# Altium PCB PCB1.PcbDoc
Units mil, origin at the board's own origin, x right, y up, seen from the top; angles counter-clockwise.
Board outline 6000 x 4000 mil, 2 copper layers (Top Layer, Bottom Layer); 11 components, 7 nets, 27 pads, 3 vias.
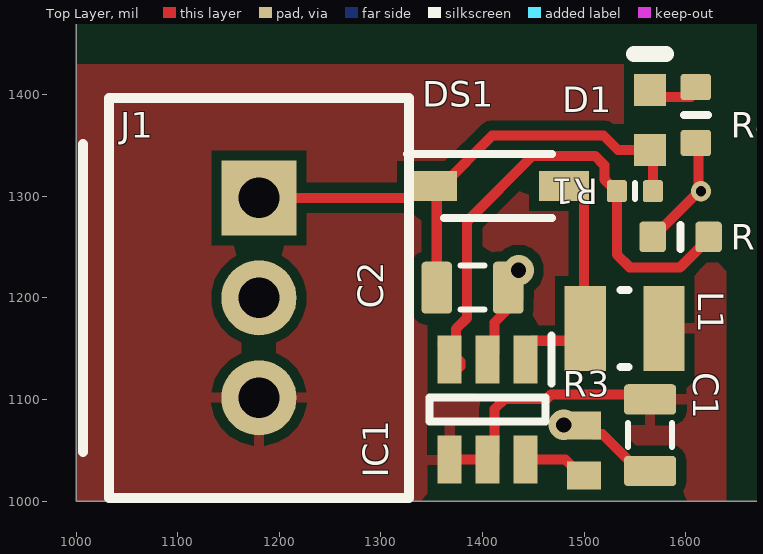
[diagram p0: Top Layer view]
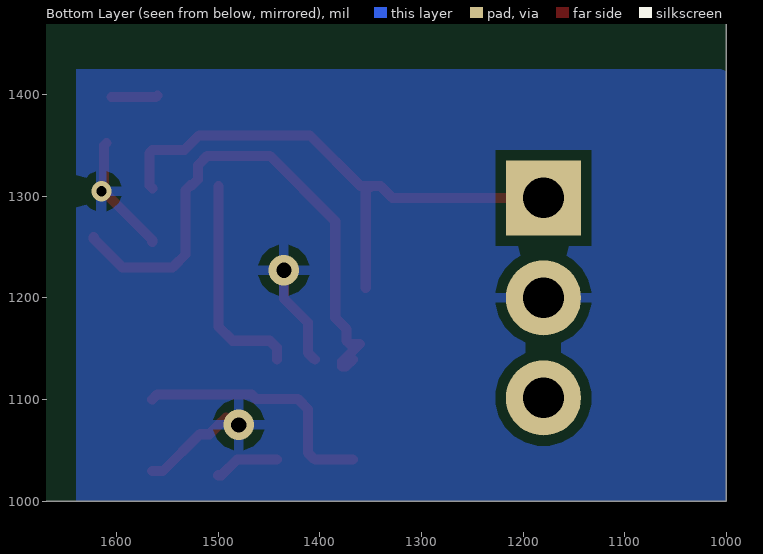
[diagram p1: Bottom Layer view, seen from below]
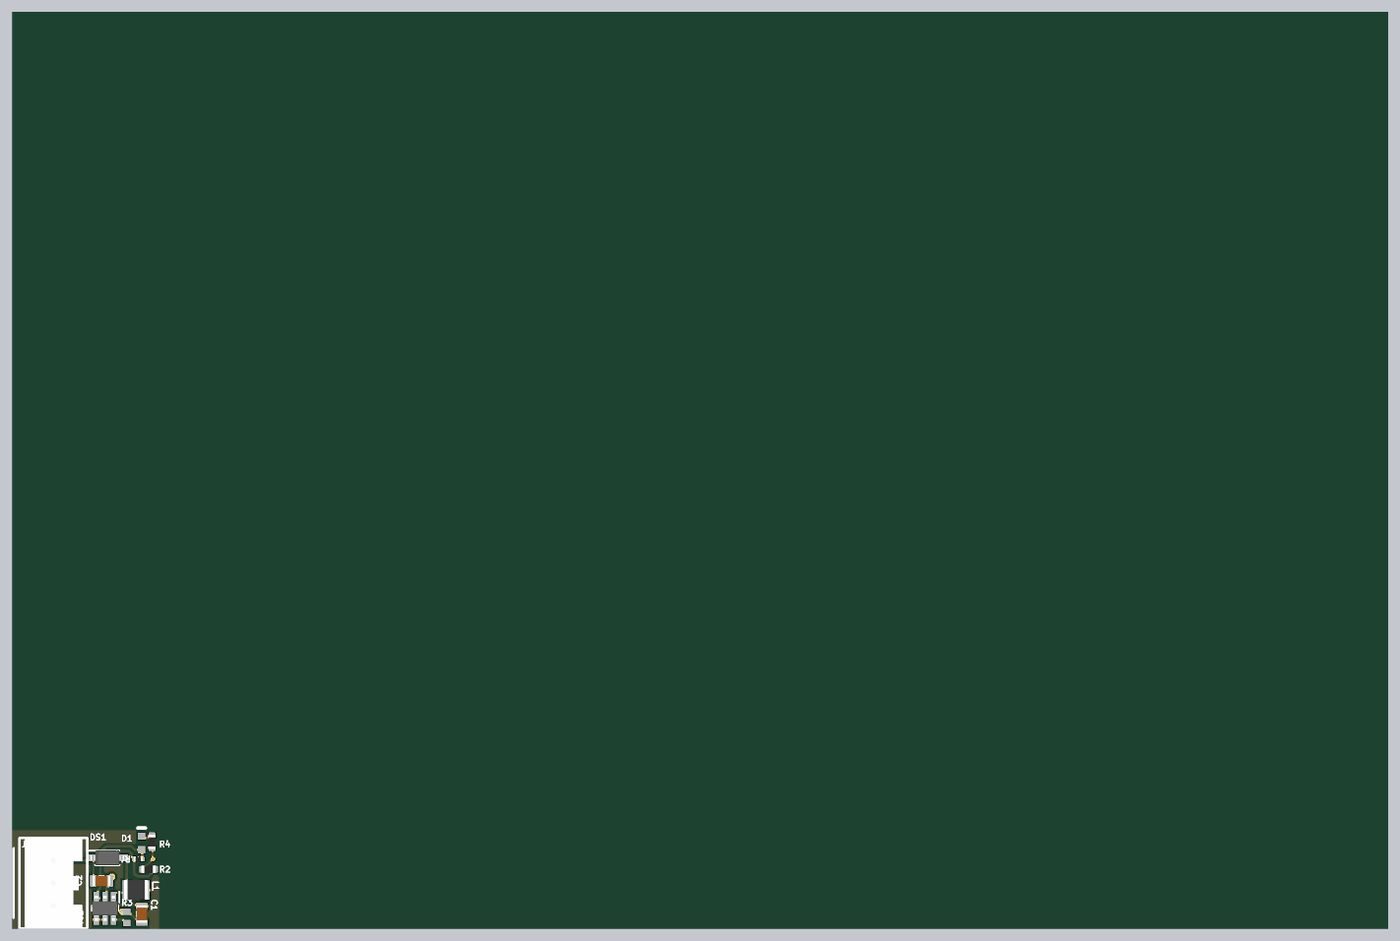
[diagram p2: 3D render of the assembled board from above, using the file's embedded part models]

## Layer stack, top to bottom
Top Solder: solder mask 0.4, Solder Resist, Dk 3.5
Top Layer: signal copper 1.4
Dielectric 1: dielectric 12.6, FR-4, Dk 4.8
Bottom Layer: signal copper 1.4
Bottom Solder: solder mask 0.4, Solder Resist, Dk 3.5

## Board outline
1000,1000 7000,1000 7000,5000 1000,5000

## Design rules (kind name [scope] priority, off if disabled: settings)
Clearance [All] p1: gap=10 ignorepadtopadclearanceinfootprint=FALSE
PolygonConnect [All] p1: connectstyle=Relief reliefconductorwidth=10 reliefentries=4 polygonreliefangle="90 Angle" airgapwidth=10
RoutingVias [All] p1: holewidth=28 width=50 viastyle="Through Hole" minholewidth=28 minwidth=50 maxholewidth=28 maxwidth=50
SolderMaskExpansion [All] p1: expansion=4 istentingtop=FALSE
SupplyNets "Schematic Supply Nets_2" [InNet('VCC')] p1: voltage=0.000
SupplyNets "Schematic Supply Nets_1" [InNet('GND')] p2: voltage=0.000
SupplyNets "Schematic Supply Nets" [InNet('+5')] p3: voltage=0.000
Width [All] p1: maxlimit=10 minlimit=10 preferedwidth=10
30 further rules are at their usual default settings.

## Components (designator, comment, footprint, x,y, rotation, side; value= is the part's Value field where it differs from the comment)
C1 "C0805C224K5RACTU" CAPC0805(2012)145_L 1565,1065 r90 top value=220nF
C2 "C0805C224K5RACTU" CAPC0805(2012)145_L 1390,1210 r180 top value=220nF
D1 "B5819W" SOD3716X125N 1415.04,1310 r0 top
DS1 "HSMH-C190" AVAG-HSMX-C190_V 1565,1375 r90 top
IC1 "mt3608L" SOT95P280X145-6N 1405,1090 r270 top
J1 "XA-3PIN" XA-3PIN-Footprint-1 1180,1298.43 r270 top
L1 "MBKK2012T4R7M" INDC2520X120X60LL20T20 1540,1170 r180 top
R1 "ERJ-1GNF1103C" RESC0402(1005)_L 1550,1305 r0 top value=110k
R2 "ERA-3AEB153V" RESC0603(1608)_L 1595,1260 r180 top value=15k
R3 "ERJ-3EKF2002V" RESC1608X55X30LL15T15 1500,1050 r90 top value=20k
R4 "RMCF0603FT1K00" RESC0603(1608)_L 1610,1380 r270 top value=1k

## Footprints (in the part's own frame and the unit in brackets; to place one, negate y for a bottom-side part, rotate by r counter-clockwise, add the part's x,y. Pads: shape width x height; smd on the part's side, far side on the other; paste and mask are expansions set on the pad)
AVAG-HSMX-C190_V [mm] "SMD, 2-Leads, Body 1.6x0.8mm, Height 0.9mm"
  rect 0.8x0.8 smd: 1(-0.75,0) 2(0.75,0)
  silkscreen extent 1.65,-0.4 1.65,0.4, body extent -0.8,-0.4 0.8,0.4, height 0.9
CAPC0805(2012)145_L [mm] "Chip Capacitor, Body 2.0x1.2mm, Height 1.45mm, IPC High Density"
  rrect25% 0.76x1.3 smd: 1(-0.9,0) 2(0.89,0)
  silkscreen extent -0.3,-0.55 0.3,0.55, body extent -1,-0.6 1,0.6, height 1.45
INDC2520X120X60LL20T20 [mm] "Chip Inductor, 2-Leads, Body 2.70x2.20mm, IPC High Density"
  rect 1.03x2.12 smd: 1(-0.985,0) 2(0.985,0)
  silkscreen extent -0.1,-0.96 0.1,0.96, body extent -1.35,-1.1 1.35,1.1, height 1.2
RESC0402(1005)_L [mm] "Chip Resistor, Body 1.0x0.5mm, IPC High Density"
  rrect25% 0.5x0.55 smd: 1(-0.45,0) 2(0.45,0)
  silkscreen extent 0,-0.2 0,0.2, body extent -0.5,-0.25 0.5,0.25, height 0.3
RESC0603(1608)_L [mm] "Chip Resistor, Body 1.6x0.8mm, IPC High Density"
  rrect25% 0.66x0.76 smd: 1(-0.7,0) 2(0.7,0)
  silkscreen extent 0,-0.3 0,0.3, body extent -0.8,-0.4 0.8,0.4, height 0.45
RESC1608X55X30LL15T15 [mm] "Chip Resistor, 2-Leads, Body 1.60x0.80mm, IPC High Density"
  rect 0.7x0.85 smd: 1(-0.625,0) 2(0.625,0)
  body extent -0.87,-0.48 0.87,0.48, height 0.55
SOD3716X125N [mm]
  rect 1.25x0.75 smd: 1(-1.65,0) 2(1.65,0)
  silkscreen extent -2.27,-0.8 1.35,0.8, body extent -1.85,-0.8 1.85,0.8, height 1.25
SOT95P280X145-6N [mm]
  rect 1.2x0.6 smd: 1(-1.25,0.95) 2(-1.25,0) 3(-1.25,-0.95) 4(1.25,-0.95) 5(1.25,0) 6(1.25,0.95)
  silkscreen extent -1.85,-1.45 0.3,1.6, body extent -1.4,-1.45 1.4,1.45, height 1.45
XA-3PIN-Footprint-1 [mil]
  rect 74x74 hole 40: 1(0,0)
  round 74 hole 40: 2(98.43,0) 3(196.85,0)
  silkscreen extent -98,-173 295,148, body extent -98,-126 295,126, height 346

## Part data
C1 C2: library part CMP-001-00147-1, "Ceramic Capacitor, Multilayer, Ceramic, 50V, 10% +Tol, 10% -Tol, X7R, 15% TC, 0.22uF, Surface Mount, 0805", Capacitor Type=Ceramic, Case/Package=0805, Max Operating Temperature=125°C, Min Operating Temperature=-55°C, Mounting Technology="Surface Mount", Pins=2, RoHS Compliant=Yes
D1: "Diode", Manufacturer_Name="Changjiang Electronics Tech (CJ)", Datasheet Link=https://datasheet.lcsc.com/szlcsc/Changjiang-Electronics-Tech-CJ-B5819W_C8598.pdf, Height=1.25mm, Manufacturer_Part_Number=B5819W
DS1: library part CMP-007-00014-2, "LED Uni-Color Red, 65 mW, 20 mA, -40 to 85 degC, 2-Pin SMD, RoHS, Tape and Reel", Case/Package=0603, Colour=Red, Forward Current=20mA, Forward Voltage=1.8V, Manufacturer=Avago, Max Operating Temperature=85°C, Min Operating Temperature=-40°C, Package Description="2-Pin Surface Mount Device, Body 1.6 x 0.8 mm, Height 0.9 mm", Package Quantity=4000, Package Reference=HSMX-C190, Power=78mW, Datasheet URL=http://docs.avagotech.com/docs/AV02-0551EN, Datasheet Version=Mar-12, Illumination Colour=Red, Lens Style=Diffused, Luminous Intensity=17mcd, Manufacturer URL=http://www.avagotech.com/, Mounting Technology=SM, Nominal Vf=1.8V, Packaging=TapeandReel, Pins=2, RoHS Compliant=True, Viewing Angle=170degrees
IC1: "Integrated Circuit", Manufacturer_Name=Aerosemi, Datasheet Link=https://datasheet.lcsc.com/lcsc/2201121530_XI-AN-Aerosemi-Tech-MT3608L_C2932326.pdf, Height=1.45mm, Manufacturer_Part_Number=mt3608L
J1: library part CMP-002-00073-4, "3 pin JST Connector"
L1: library part CMP-006-00022-1, "General Purpose Inductor, 4.7uH, 20%, 1 Element, Metal-Core, SMD, 0805", Max Current Rating=600mA, Max Operating Temperature=105°C, Min Operating Temperature=-40°C, Tolerance=20%, RoHS Compliant=Yes
R1: library part CMP-009-00289-1, "Fixed Resistor, Metal Glaze/thick Film, 0.05W, 110000ohm, 25V, 1% +/-Tol, 200ppm/Cel, Surface Mount, 0201", Case/Package=0201, Max Operating Temperature=125°C, Min Operating Temperature=-55°C, Power=50mW, Tolerance=1%, Mounting Technology="Surface Mount", Pins=2, RoHS Compliant=Yes
R2: library part CMP-009-00220-2, "Fixed Resistor, Thin Film, 0.1W, 15000ohm, 75V, 0.1% +/-Tol, 25ppm/Cel, Surface Mount, 0603", Case/Package=0603, Max Operating Temperature=155°C, Min Operating Temperature=-55°C, Power=100mW, Tolerance=0.1%, Mounting Technology="Surface Mount", Pins=2, RoHS Compliant=Yes
R3: library part CMP-009-00211-1, "Fixed Resistor, Metal Glaze/thick Film, 0.1W, 20000ohm, 75V, 1% +/-Tol, 100ppm/Cel, Surface Mount, 0603", Case/Package=0603, Max Operating Temperature=155°C, Min Operating Temperature=-55°C, Power=100mW, Tolerance=1%, Mounting Technology="Surface Mount", Pins=2, RoHS Compliant=Yes
R4: library part CMP-009-00263-1, "Fixed Resistor, Metal Glaze/thick Film, 0.1W, 1000ohm, 75V, 1% +/-Tol, 100ppm/Cel, Surface Mount, 0603", Case/Package=0603, Max Operating Temperature=155°C, Min Operating Temperature=-55°C, Power=100mW, Tolerance=1%, Mounting Technology="Surface Mount", Pins=2, RoHS Compliant=Yes

## Via types
v1: diameter 30, hole 15, Top Layer to Bottom Layer, 2 vias
v2: diameter 20, hole 10, Top Layer to Bottom Layer, 1 vias

## Nets (pads, with @x,y where several pads share a name; then routed paths per layer and width w, separated by ;. In a path a pad name is that pad's centre, name@x,y a point inside that pad or via, vN(x,y) a via of type N, cw(c..) or ccw(c..) an arc to the next point about the centre after c; other vN are vias at no path point)
+5: C2.2 D1.1 DS1.1 J1.1 R1.2 | length 558.3
  Top Layer w10: J1.1 1328.66,1298.43 1340.24,1310 D1.1 ; C2.2 1354.96,1305.12 D1.1 ; R1.2@1564.74,1307.85 1567.72,1310.83 1567.72,1342.76 DS1.1 1533.39,1345.48 1519.1,1359.76 1409.69,1359.76 1359.92,1310 D1.1
GND: C1.1 C2.1 IC1.2 J1.2 R2.2 R3.2 R4.2 | length 331.6
  Top Layer w10: IC1.2 1411.81,1146.02 1411.81,1175.75 1435.43,1199.37 1435.43,1227.07 v1(1435.47,1227.11) ; v1(1480,1075) 1485.32,1075 1492.46,1082.14 R3.2 1508.78,1065.83 1518.11,1065.83 1554.37,1029.57 C1.1 ; R2.2@1565,1255 1565,1256.96 1613.04,1305 v2(1615,1305) 1612.5,1307.5 1612.5,1349.94 R4.2
NetD1_2: D1.2 IC1.1 L1.2 | length 216.1
  Top Layer w10: IC1.1 1442.4,1151.02 1449.21,1157.83 1485.94,1157.83 1499.96,1171.85 D1.2@1499.96,1310
NetDS1_2: DS1.2 R4.1 | length 45.6
  Top Layer w10: DS1.2@1560,1399.06 1561.5,1397.56 R4.1@1605,1397.56
NetIC1_3: IC1.3 R1.1 R2.1 | length 548.1
  Top Layer w10: IC1.3 1374.41,1132.4 1378.19,1132.4 1378.19,1137.2 1360.79,1154.6 1370.76,1154.6 1374,1157.83 1374,1169.46 1384.92,1180.39 1384.92,1275.5 1449.18,1339.76 1510.82,1339.76 1519.96,1330.62 1519.96,1316.68 1525.82,1310.83 1527.44,1310.83 1532.28,1305.98 R1.1 1532.28,1242.72 1544.96,1230.04 1594.56,1230.04 1622.56,1258.04 R2.1
NetIC1_6: IC1.6 R3.1 | length 64
  Top Layer w10: IC1.6 1481.65,1040.79 1497.05,1025.39 R3.1
VCC: C1.2 IC1.4 IC1.5 J1.3 L1.1 | length 251.3
  Top Layer w10: IC1.4 IC1.5 1411.81,1047.6 1411.81,1090.63 1421.77,1100.59 1463.16,1100.59 1467.57,1105 1560.04,1105 C1.2

## Polygon pours and split planes (outlines as drawn)
GND on Bottom Layer "GND_L02_P001" (solid, pour order 1): 1000,1000 1000,1430 1005,1425 1640,1425 1640,1000
VCC on Top Layer "VCC_L01_P000" (solid, pour order 0): 1000,1000 1000,1430 1625,1430 1640,1415 1640,1000